# Altium PCB Trigger.PcbDoc (part 3 of 3)
Units mil, origin at the board's own origin, x right, y up, seen from the top; angles counter-clockwise.
Board outline 9937 x 6299 mil, 4 copper layers (TopLayer, MidLayer1, MidLayer2, BottomLayer); 197 components, 279 nets, 1978 pads, 340 vias.
Unrouted connection lines stored in the file: 59.
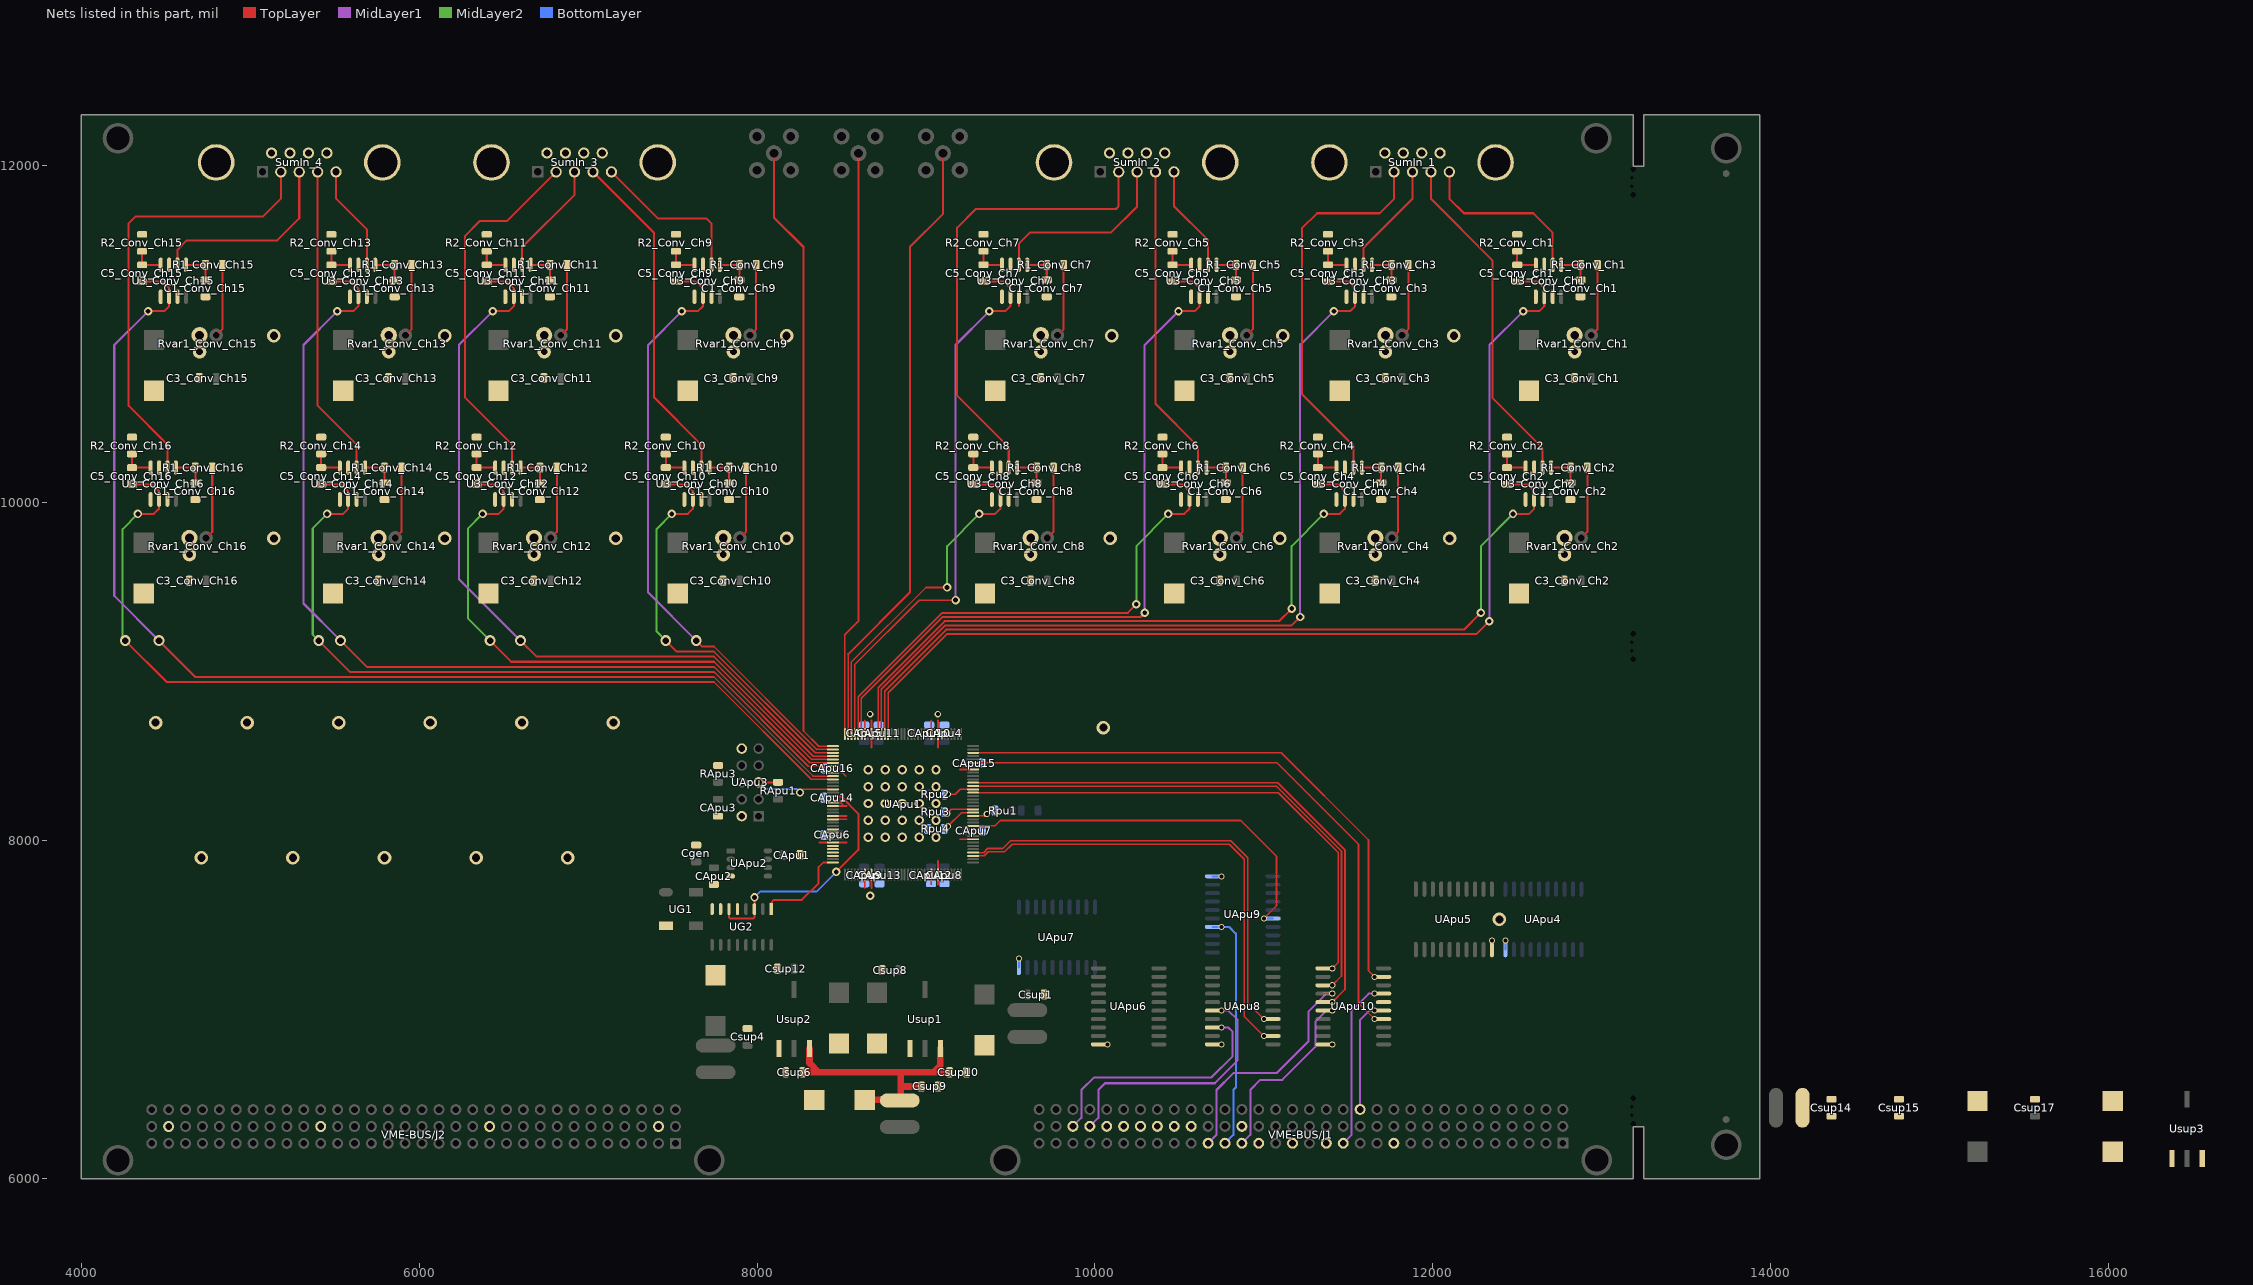
[diagram p5: the nets of this part, all layers, seen from the top]

## Via types
v1: diameter 36, hole 24, TopLayer to BottomLayer, 142 vias
v2: diameter 46, hole 32, TopLayer to BottomLayer, 64 vias
v3: diameter 50, hole 28, TopLayer to BottomLayer, 53 vias
v4: diameter 80, hole 48, TopLayer to BottomLayer, 27 vias
v5: diameter 56, hole 32, TopLayer to BottomLayer, 25 vias
v6: diameter 40, hole 24, TopLayer to BottomLayer, 18 vias
v7: diameter 64, hole 40, TopLayer to BottomLayer, 8 vias
v8: diameter 42, hole 28, TopLayer to BottomLayer, 2 vias
v9: diameter 54, hole 36, TopLayer to BottomLayer, 1 vias

## Nets (pads, with @x,y where several pads share a name; then routed paths per layer and width w, separated by ;. In a path a pad name is that pad's centre, name@x,y a point inside that pad or via, vN(x,y) a via of type N, cw(c..) or ccw(c..) an arc to the next point about the centre after c; other vN are vias at no path point) (continued)
GND: C1_Conv_Ch1.1 C1_Conv_Ch2.1 C1_Conv_Ch3.1 C1_Conv_Ch4.1 C1_Conv_Ch5.1 C1_Conv_Ch6.1 C1_Conv_Ch7.1 C1_Conv_Ch8.1 C1_Conv_Ch9.1 C1_Conv_Ch10.1 C1_Conv_Ch11.1 C1_Conv_Ch12.1 C1_Conv_Ch13.1 C1_Conv_Ch14.1 C1_Conv_Ch15.1 C1_Conv_Ch16.1 C3_Conv_Ch1.1 C3_Conv_Ch2.1 C3_Conv_Ch3.1 C3_Conv_Ch4.1 C3_Conv_Ch5.1 C3_Conv_Ch6.1 C3_Conv_Ch7.1 C3_Conv_Ch8.1 C3_Conv_Ch9.1 C3_Conv_Ch10.1 C3_Conv_Ch11.1 C3_Conv_Ch12.1 C3_Conv_Ch13.1 C3_Conv_Ch14.1 C3_Conv_Ch15.1 C3_Conv_Ch16.1 C4_Conv_Ch1.- C4_Conv_Ch2.- C4_Conv_Ch3.- C4_Conv_Ch4.- C4_Conv_Ch5.- C4_Conv_Ch6.- C4_Conv_Ch7.- C4_Conv_Ch8.- C4_Conv_Ch9.- C4_Conv_Ch10.- C4_Conv_Ch11.- C4_Conv_Ch12.- C4_Conv_Ch13.- C4_Conv_Ch14.- C4_Conv_Ch15.- C4_Conv_Ch16.- CApu1.1 CApu2.1 CApu3.2 CApu4.1 CApu5.1 CApu6.1 CApu7.1 CApu8.1 CApu9.1 CApu10.1 CApu11.1 CApu12.1 CApu13.1 CApu14.1 CApu15.1 CApu16.1 Cgen.1 Csup1.2 Csup2.- Csup3.- Csup4.2 Csup5.- Csup6.2 Csup7.- Csup8.2 Csup9.2 Csup10.2 Csup11.- Csup12.2 Csup13.- Csup14.2 Csup15.2 Csup16.- Csup17.2 R2_Conv_Ch1.2 R2_Conv_Ch2.2 R2_Conv_Ch3.2 R2_Conv_Ch4.2 R2_Conv_Ch5.2 R2_Conv_Ch6.2 R2_Conv_Ch7.2 R2_Conv_Ch8.2 R2_Conv_Ch9.2 R2_Conv_Ch10.2 R2_Conv_Ch11.2 R2_Conv_Ch12.2 R2_Conv_Ch13.2 R2_Conv_Ch14.2 R2_Conv_Ch15.2 R2_Conv_Ch16.2 RApu3.2 Rpu4.1 Rvar1_Conv_Ch1.1 Rvar1_Conv_Ch2.1 Rvar1_Conv_Ch3.1 Rvar1_Conv_Ch4.1 Rvar1_Conv_Ch5.1 Rvar1_Conv_Ch6.1 Rvar1_Conv_Ch7.1 Rvar1_Conv_Ch8.1 Rvar1_Conv_Ch9.1 Rvar1_Conv_Ch10.1 Rvar1_Conv_Ch11.1 Rvar1_Conv_Ch12.1 Rvar1_Conv_Ch13.1 Rvar1_Conv_Ch14.1 Rvar1_Conv_Ch15.1 Rvar1_Conv_Ch16.1 SumIn_1.6 SumIn_1.7 SumIn_1.8 SumIn_1.9 SumIn_1.10 SumIn_1.11 SumIn_2.6 SumIn_2.7 SumIn_2.8 SumIn_2.9 SumIn_2.10 SumIn_2.11 SumIn_3.6 SumIn_3.7 SumIn_3.8 SumIn_3.9 SumIn_3.10 SumIn_3.11 SumIn_4.6 SumIn_4.7 SumIn_4.8 SumIn_4.9 SumIn_4.10 SumIn_4.11 U3_Conv_Ch1.3 U3_Conv_Ch1.5 U3_Conv_Ch2.3 U3_Conv_Ch2.5 U3_Conv_Ch3.3 U3_Conv_Ch3.5 U3_Conv_Ch4.3 U3_Conv_Ch4.5 U3_Conv_Ch5.3 U3_Conv_Ch5.5 U3_Conv_Ch6.3 U3_Conv_Ch6.5 U3_Conv_Ch7.3 U3_Conv_Ch7.5 U3_Conv_Ch8.3 U3_Conv_Ch8.5 U3_Conv_Ch9.3 U3_Conv_Ch9.5 U3_Conv_Ch10.3 U3_Conv_Ch10.5 U3_Conv_Ch11.3 U3_Conv_Ch11.5 U3_Conv_Ch12.3 U3_Conv_Ch12.5 U3_Conv_Ch13.3 U3_Conv_Ch13.5 U3_Conv_Ch14.3 U3_Conv_Ch14.5 U3_Conv_Ch15.3 U3_Conv_Ch15.5 U3_Conv_Ch16.3 U3_Conv_Ch16.5 UApu1.9 UApu1.18 UApu1.19 UApu1.22 UApu1.23 UApu1.30 UApu1.43 UApu1.45 UApu1.63 UApu1.65 UApu1.80 UApu1.101 UApu1.116 UApu1.118 UApu1.136 UApu1.138 UApu2.4 UApu3.2 UApu3.10 UApu4.10 UApu5.10 UApu6.10 UApu7.10 UApu8.10 UApu9.10 UApu10.10 UG1.2 UG2.5 Usup1.1 Usup2.1 Usup3.1 VME-BUS/J1.A11 VME-BUS/J1.A15 VME-BUS/J1.A17 VME-BUS/J1.A19 VME-BUS/J1.B20 VME-BUS/J1.B23 VME-BUS/J2.B2 VME-BUS/J2.B12 VME-BUS/J2.B22 VME-BUS/J2.B31 | length 1955.8
  TopLayer w10: 8368.43,7989.65 UApu1.30@8448.94,7989.65 8529.44,7989.65 ; UApu1.23@8448.94,8127.44 8529.44,8127.44 ; UApu1.22@8448.94,8147.13 8529.44,8147.13 ; UApu1.19@8448.94,8206.18 8529.44,8206.18 ; UApu1.18@8448.94,8225.87 8495.31,8225.87 8515,8206.18 ; UApu1.9@8448.94,8403.03 8505.97,8403.03 8525,8384 ; 8637.91,7720.17 UApu1.43@8637.91,7800.67 ; UApu1.138@8637.91,8631.38 8637.91,8711.88 ; 8677.28,7720.17 UApu1.45@8677.28,7800.67 ; 8677.28,8550.87 UApu1.136@8677.28,8631.38 8677.28,8711.88 ; 9031.61,7740 UApu1.63@9031.61,7800.67 ; UApu1.118@9031.61,8631.38 9031.61,8711.88 ; 9070.98,7740 UApu1.65@9070.98,7810 ; UApu1.65@9070.98,7800.67 9070.98,7881.17 ; 9070.98,8550.87 UApu1.116@9070.98,8631.38 9070.98,8711.88 ; 9199.14,8009.33 UApu1.80@9279.65,8009.33 ; 9199.14,8422.72 UApu1.101@9279.65,8422.72
  TopLayer w12: UApu6.10@10020.87,6795 v1(10075,6795) ; UApu8.10@10695.87,6795 v1(10750,6795) ; UApu10.10@11350.87,6795 v1(11405,6795) ; UApu5.10@12350,7355.87 v1(12350,7410)
  BottomLayer w12: UApu7.10@9550,7250 v1(9550,7304.13) ; UApu9.10@10695.87,7790 v1(10750,7790) ; UApu4.10@12430,7355.87 v1(12430,7410)
  other v3: 8670,7675
  other v4: 12395,7535 4710.95,7900 5252.84,7900 5794.74,7900 6336.63,7900 6878.53,7900 10050,8670 4440,8700 4981.89,8700 5523.79,8700 6065.68,8700 6607.58,8700 7149.47,8700 5140,9790 6151.67,9790 7163.33,9790 8175,9790 10090,9790 11095,9790 12100,9790 5140,10990 6151.67,10990 7163.33,10990 8175,10990 10100,10990 11112.5,10990 12125,10990
  other v5: 8659.29,8021.02 8759.29,8021.02 8859.29,8021.02 8959.29,8021.02 9059.29,8021.02 8659.29,8121.02 8759.29,8121.02 8859.29,8121.02 8959.29,8121.02 9059.29,8121.02 8659.29,8221.02 8759.29,8221.02 8859.29,8221.02 8959.29,8221.02 9059.29,8221.02 8659.29,8321.02 8759.29,8321.02 8859.29,8321.02 8959.29,8321.02 9059.29,8321.02 8659.29,8421.02 8759.29,8421.02 8859.29,8421.02 8959.29,8421.02 9059.29,8421.02
  other v6: 8670,8750 9070,8750
IACK: UApu10.6 VME-BUS/J1.A20 | length 1157.4
  TopLayer w12: UApu10.6@11350.87,6995 v1(11405,6995)
  MidLayer1 w12: VME-BUS/J1.A20@10870,6210 10920,6260 10920,6525 10980,6585 11110,6585 11305,6780 11305,6930 11370,6995 v1(11405,6995)
IACKIN: UApu9.4 VME-BUS/J1.A21 | length 1422.6
  BottomLayer w12: UApu9.4@10695.87,7490 v1(10750,7490) 10795,7490 10835,7450 10835,6540 10820,6525 10820,6260 VME-BUS/J1.A21@10770,6210
IACKINPL: UApu1.84 UApu9.16 | length 2349.8
  TopLayer w8: UApu1.84@9279.65,8088.07 9376.61,8088.07 9408.07,8088.07
  TopLayer w10: 9408.07,8088.07 9440,8120 10863.28,8120 11075,7908.28 11075,7615 v1(11000,7540)
  BottomLayer w12: v1(11000,7540) UApu9.16@11054.13,7540
IACKOUT: UApu10.16 VME-BUS/J1.A22 | length 1413.5
  TopLayer w12: 11350.87,7095 v1(11405,7095)
  MidLayer1 w12: VME-BUS/J1.A22@10670,6210 10720,6260 10720,6525 10820,6625 11075,6625 11265,6815 11265,6990 11370,7095 v1(11405,7095)
IACKPL: UApu1.103 UApu10.14 | length 3608.6
  TopLayer w8: UApu1.103@9279.65,8462.09 11078.06,8462.09
  TopLayer w10: 11078.06,8462.09 11560,7980.15 11560,7040 v1(11655,6945)
  TopLayer w12: v1(11655,6945) UApu10.14@11709.13,6945
IRQ1: UApu8.8 VME-BUS/J1.B30 | length 1488
  TopLayer w12: UApu8.8@10695.87,6895 v1(10750,6895)
  MidLayer1 w12: VME-BUS/J1.B30@9870,6310 9920,6360 9920,6525 9995,6600 10690,6600 10815,6725 10815,6870 10790,6895 v1(10750,6895)
IRQ2: UApu8.6 VME-BUS/J1.B29 | length 1545.1
  TopLayer w12: UApu8.6@10695.87,6995 v1(10750,6995)
  MidLayer1 w12: VME-BUS/J1.B29@9970,6310 10020,6360 10020,6525 10060,6565 10710,6565 10845,6700 10845,6940 10790,6995 v1(10750,6995)
IRQ3: VME-BUS/J1.B28
IRQ4: VME-BUS/J1.B27
IRQ5: VME-BUS/J1.B26
IRQ6: VME-BUS/J1.B25
IRQ7: VME-BUS/J1.B24
IRQPL1: UApu1.75 UApu8.12 | length 2818
  TopLayer w8: UApu1.75@9279.65,7910.91 9345.91,7910.91 9370,7935
  TopLayer w10: 9370,7935 9465,7935 9510,7980 10795,7980 10885,7890 10885,6960 v1(11000,6845)
  TopLayer w12: v1(11000,6845) UApu8.12@11054.13,6845
IRQPL2: UApu1.76 UApu8.14 | length 2744
  TopLayer w8: UApu1.76@9279.65,7930.59 9340.59,7930.59 9365,7955
  TopLayer w10: 9365,7955 9455,7955 9500,8000 10805,8000 10905,7900 10905,7040 v1(11000,6945)
  TopLayer w12: v1(11000,6945) UApu8.14@11054.13,6945
LEDCLK: UApu1.27
LEDERROR: UApu1.31
LEDTRIGGER: UApu1.28
LWORD*: UApu10.15 VME-BUS/J1.C13 | length 691.9
  TopLayer w12: v1(11655,6995) UApu10.15@11709.13,6995
  MidLayer1 w12: VME-BUS/J1.C13@11570,6410 11570,6940 11625,6995 v1(11655,6995)
LWORD*PL: UApu1.97 UApu10.5 | length 3352
  TopLayer w8: UApu1.97@9279.65,8343.98 11083.03,8343.98
  TopLayer w10: 11083.03,8343.98 11480,7947.01 11480,7120 v1(11405,7045)
  TopLayer w12: UApu10.5@11350.87,7045 v1(11405,7045)
NCONFIG: RApu1.2 UApu1.14 UApu3.5 | length 587.2
  TopLayer w8: 8272.87,8304.61 UApu1.14@8448.94,8304.61
  TopLayer w12: UApu3.5@8009.29,8346.02 RApu1.2@8124.29,8346.02 ; v3(8254.29,8286.02) 8272.87,8304.61
  BottomLayer w12: UApu3.5@8009.29,8346.02 8049.29,8306.02 8234.29,8306.02 v3(8254.29,8286.02)
NetC1_Conv_Ch1_2: C1_Conv_Ch1.2 R1_Conv_Ch1.2 U3_Conv_Ch1.1 | length 204.5
  TopLayer w12: U3_Conv_Ch1.1@12760,11409.49 R1_Conv_Ch1.2@12865,11409.49 R1_Conv_Ch1.2@12875,11409.49 R1_Conv_Ch1.2@12875,11389.49 C1_Conv_Ch1.2@12875,11330 C1_Conv_Ch1.2@12875,11320
NetC1_Conv_Ch2_2: C1_Conv_Ch2.2 R1_Conv_Ch2.2 U3_Conv_Ch2.1 | length 204.5
  TopLayer w12: U3_Conv_Ch2.1@12700,10209.49 R1_Conv_Ch2.2@12805,10209.49 R1_Conv_Ch2.2@12815,10209.49 R1_Conv_Ch2.2@12815,10189.49 C1_Conv_Ch2.2@12815,10130 C1_Conv_Ch2.2@12815,10120
NetC1_Conv_Ch3_2: C1_Conv_Ch3.2 R1_Conv_Ch3.2 U3_Conv_Ch3.1 | length 204.5
  TopLayer w12: U3_Conv_Ch3.1@11640,11409.49 R1_Conv_Ch3.2@11745,11409.49 R1_Conv_Ch3.2@11755,11409.49 R1_Conv_Ch3.2@11755,11389.49 C1_Conv_Ch3.2@11755,11330 C1_Conv_Ch3.2@11755,11320
NetC1_Conv_Ch4_2: C1_Conv_Ch4.2 R1_Conv_Ch4.2 U3_Conv_Ch4.1 | length 204.5
  TopLayer w12: U3_Conv_Ch4.1@11580,10209.49 R1_Conv_Ch4.2@11685,10209.49 R1_Conv_Ch4.2@11695,10209.49 R1_Conv_Ch4.2@11695,10189.49 C1_Conv_Ch4.2@11695,10130 C1_Conv_Ch4.2@11695,10120
NetC1_Conv_Ch5_2: C1_Conv_Ch5.2 R1_Conv_Ch5.2 U3_Conv_Ch5.1 | length 204.5
  TopLayer w12: U3_Conv_Ch5.1@10720,11409.49 R1_Conv_Ch5.2@10825,11409.49 R1_Conv_Ch5.2@10835,11409.49 R1_Conv_Ch5.2@10835,11389.49 C1_Conv_Ch5.2@10835,11330 C1_Conv_Ch5.2@10835,11320
NetC1_Conv_Ch6_2: C1_Conv_Ch6.2 R1_Conv_Ch6.2 U3_Conv_Ch6.1 | length 204.5
  TopLayer w12: U3_Conv_Ch6.1@10660,10209.49 R1_Conv_Ch6.2@10765,10209.49 R1_Conv_Ch6.2@10775,10209.49 R1_Conv_Ch6.2@10775,10189.49 C1_Conv_Ch6.2@10775,10130 C1_Conv_Ch6.2@10775,10120
NetC1_Conv_Ch7_2: C1_Conv_Ch7.2 R1_Conv_Ch7.2 U3_Conv_Ch7.1 | length 204.5
  TopLayer w12: U3_Conv_Ch7.1@9600,11409.49 R1_Conv_Ch7.2@9705,11409.49 R1_Conv_Ch7.2@9715,11409.49 R1_Conv_Ch7.2@9715,11389.49 C1_Conv_Ch7.2@9715,11330 C1_Conv_Ch7.2@9715,11320
NetC1_Conv_Ch8_2: C1_Conv_Ch8.2 R1_Conv_Ch8.2 U3_Conv_Ch8.1 | length 204.5
  TopLayer w12: U3_Conv_Ch8.1@9540,10209.49 R1_Conv_Ch8.2@9645,10209.49 R1_Conv_Ch8.2@9655,10209.49 R1_Conv_Ch8.2@9655,10189.49 C1_Conv_Ch8.2@9655,10130 C1_Conv_Ch8.2@9655,10120
NetC1_Conv_Ch9_2: C1_Conv_Ch9.2 R1_Conv_Ch9.2 U3_Conv_Ch9.1 | length 204.5
  TopLayer w12: U3_Conv_Ch9.1@7780,11409.49 R1_Conv_Ch9.2@7885,11409.49 R1_Conv_Ch9.2@7895,11409.49 R1_Conv_Ch9.2@7895,11389.49 C1_Conv_Ch9.2@7895,11330 C1_Conv_Ch9.2@7895,11320
NetC1_Conv_Ch10_2: C1_Conv_Ch10.2 R1_Conv_Ch10.2 U3_Conv_Ch10.1 | length 204.5
  TopLayer w12: U3_Conv_Ch10.1@7720,10209.49 R1_Conv_Ch10.2@7825,10209.49 R1_Conv_Ch10.2@7835,10209.49 R1_Conv_Ch10.2@7835,10189.49 C1_Conv_Ch10.2@7835,10130 C1_Conv_Ch10.2@7835,10120
NetC1_Conv_Ch11_2: C1_Conv_Ch11.2 R1_Conv_Ch11.2 U3_Conv_Ch11.1 | length 204.5
  TopLayer w12: U3_Conv_Ch11.1@6660,11409.49 R1_Conv_Ch11.2@6765,11409.49 R1_Conv_Ch11.2@6775,11409.49 R1_Conv_Ch11.2@6775,11389.49 C1_Conv_Ch11.2@6775,11330 C1_Conv_Ch11.2@6775,11320
NetC1_Conv_Ch12_2: C1_Conv_Ch12.2 R1_Conv_Ch12.2 U3_Conv_Ch12.1 | length 204.5
  TopLayer w12: U3_Conv_Ch12.1@6600,10209.49 R1_Conv_Ch12.2@6705,10209.49 R1_Conv_Ch12.2@6715,10209.49 R1_Conv_Ch12.2@6715,10189.49 C1_Conv_Ch12.2@6715,10130 C1_Conv_Ch12.2@6715,10120
NetC1_Conv_Ch13_2: C1_Conv_Ch13.2 R1_Conv_Ch13.2 U3_Conv_Ch13.1 | length 204.5
  TopLayer w12: U3_Conv_Ch13.1@5740,11409.49 R1_Conv_Ch13.2@5845,11409.49 R1_Conv_Ch13.2@5855,11409.49 R1_Conv_Ch13.2@5855,11389.49 C1_Conv_Ch13.2@5855,11330 C1_Conv_Ch13.2@5855,11320
NetC1_Conv_Ch14_2: C1_Conv_Ch14.2 R1_Conv_Ch14.2 U3_Conv_Ch14.1 | length 204.5
  TopLayer w12: U3_Conv_Ch14.1@5680,10209.49 R1_Conv_Ch14.2@5785,10209.49 R1_Conv_Ch14.2@5795,10209.49 R1_Conv_Ch14.2@5795,10189.49 C1_Conv_Ch14.2@5795,10130 C1_Conv_Ch14.2@5795,10120
NetC1_Conv_Ch15_2: C1_Conv_Ch15.2 R1_Conv_Ch15.2 U3_Conv_Ch15.1 | length 204.5
  TopLayer w12: U3_Conv_Ch15.1@4620,11409.49 R1_Conv_Ch15.2@4725,11409.49 R1_Conv_Ch15.2@4735,11409.49 R1_Conv_Ch15.2@4735,11389.49 C1_Conv_Ch15.2@4735,11330 C1_Conv_Ch15.2@4735,11320
NetC1_Conv_Ch16_2: C1_Conv_Ch16.2 R1_Conv_Ch16.2 U3_Conv_Ch16.1 | length 204.5
  TopLayer w12: U3_Conv_Ch16.1@4560,10209.49 R1_Conv_Ch16.2@4665,10209.49 R1_Conv_Ch16.2@4675,10209.49 R1_Conv_Ch16.2@4675,10189.49 C1_Conv_Ch16.2@4675,10130 C1_Conv_Ch16.2@4675,10120
NetC5_Conv_Ch1_1: C5_Conv_Ch1.1 R2_Conv_Ch1.1 U3_Conv_Ch1.4 | length 194.7
  TopLayer w12: R2_Conv_Ch1.1@12500,11500 R2_Conv_Ch1.1@12500,11490 R2_Conv_Ch1.1@12500,11480 C5_Conv_Ch1.1@12500,11419.49 12510,11409.49 C5_Conv_Ch1.1@12520,11409.49 U3_Conv_Ch1.4@12610,11409.49
NetC5_Conv_Ch1_2: C5_Conv_Ch1.2 U3_Conv_Ch1.6
NetC5_Conv_Ch2_1: C5_Conv_Ch2.1 R2_Conv_Ch2.1 U3_Conv_Ch2.4 | length 194.7
  TopLayer w12: R2_Conv_Ch2.1@12440,10300 R2_Conv_Ch2.1@12440,10290 R2_Conv_Ch2.1@12440,10280 C5_Conv_Ch2.1@12440,10219.49 12450,10209.49 C5_Conv_Ch2.1@12460,10209.49 U3_Conv_Ch2.4@12550,10209.49
NetC5_Conv_Ch2_2: C5_Conv_Ch2.2 U3_Conv_Ch2.6
NetC5_Conv_Ch3_1: C5_Conv_Ch3.1 R2_Conv_Ch3.1 U3_Conv_Ch3.4 | length 194.7
  TopLayer w12: R2_Conv_Ch3.1@11380,11500 R2_Conv_Ch3.1@11380,11490 R2_Conv_Ch3.1@11380,11480 C5_Conv_Ch3.1@11380,11419.49 11390,11409.49 C5_Conv_Ch3.1@11400,11409.49 U3_Conv_Ch3.4@11490,11409.49
NetC5_Conv_Ch3_2: C5_Conv_Ch3.2 U3_Conv_Ch3.6
NetC5_Conv_Ch4_1: C5_Conv_Ch4.1 R2_Conv_Ch4.1 U3_Conv_Ch4.4 | length 194.7
  TopLayer w12: R2_Conv_Ch4.1@11320,10300 R2_Conv_Ch4.1@11320,10290 R2_Conv_Ch4.1@11320,10280 C5_Conv_Ch4.1@11320,10219.49 11330,10209.49 C5_Conv_Ch4.1@11340,10209.49 U3_Conv_Ch4.4@11430,10209.49
NetC5_Conv_Ch4_2: C5_Conv_Ch4.2 U3_Conv_Ch4.6
NetC5_Conv_Ch5_1: C5_Conv_Ch5.1 R2_Conv_Ch5.1 U3_Conv_Ch5.4 | length 194.7
  TopLayer w12: R2_Conv_Ch5.1@10460,11500 R2_Conv_Ch5.1@10460,11490 R2_Conv_Ch5.1@10460,11480 C5_Conv_Ch5.1@10460,11419.49 10470,11409.49 C5_Conv_Ch5.1@10480,11409.49 U3_Conv_Ch5.4@10570,11409.49
NetC5_Conv_Ch5_2: C5_Conv_Ch5.2 U3_Conv_Ch5.6
NetC5_Conv_Ch6_1: C5_Conv_Ch6.1 R2_Conv_Ch6.1 U3_Conv_Ch6.4 | length 194.7
  TopLayer w12: R2_Conv_Ch6.1@10400,10300 R2_Conv_Ch6.1@10400,10290 R2_Conv_Ch6.1@10400,10280 C5_Conv_Ch6.1@10400,10219.49 10410,10209.49 C5_Conv_Ch6.1@10420,10209.49 U3_Conv_Ch6.4@10510,10209.49
NetC5_Conv_Ch6_2: C5_Conv_Ch6.2 U3_Conv_Ch6.6
NetC5_Conv_Ch7_1: C5_Conv_Ch7.1 R2_Conv_Ch7.1 U3_Conv_Ch7.4 | length 194.7
  TopLayer w12: R2_Conv_Ch7.1@9340,11500 R2_Conv_Ch7.1@9340,11490 R2_Conv_Ch7.1@9340,11480 C5_Conv_Ch7.1@9340,11419.49 9350,11409.49 C5_Conv_Ch7.1@9360,11409.49 U3_Conv_Ch7.4@9450,11409.49
NetC5_Conv_Ch7_2: C5_Conv_Ch7.2 U3_Conv_Ch7.6
NetC5_Conv_Ch8_1: C5_Conv_Ch8.1 R2_Conv_Ch8.1 U3_Conv_Ch8.4 | length 194.7
  TopLayer w12: R2_Conv_Ch8.1@9280,10300 R2_Conv_Ch8.1@9280,10290 R2_Conv_Ch8.1@9280,10280 C5_Conv_Ch8.1@9280,10219.49 9290,10209.49 C5_Conv_Ch8.1@9300,10209.49 U3_Conv_Ch8.4@9390,10209.49
NetC5_Conv_Ch8_2: C5_Conv_Ch8.2 U3_Conv_Ch8.6
NetC5_Conv_Ch9_1: C5_Conv_Ch9.1 R2_Conv_Ch9.1 U3_Conv_Ch9.4 | length 194.7
  TopLayer w12: R2_Conv_Ch9.1@7520,11500 R2_Conv_Ch9.1@7520,11490 R2_Conv_Ch9.1@7520,11480 C5_Conv_Ch9.1@7520,11419.49 7530,11409.49 C5_Conv_Ch9.1@7540,11409.49 U3_Conv_Ch9.4@7630,11409.49
NetC5_Conv_Ch9_2: C5_Conv_Ch9.2 U3_Conv_Ch9.6
NetC5_Conv_Ch10_1: C5_Conv_Ch10.1 R2_Conv_Ch10.1 U3_Conv_Ch10.4 | length 194.7
  TopLayer w12: R2_Conv_Ch10.1@7460,10300 R2_Conv_Ch10.1@7460,10290 R2_Conv_Ch10.1@7460,10280 C5_Conv_Ch10.1@7460,10219.49 7470,10209.49 C5_Conv_Ch10.1@7480,10209.49 U3_Conv_Ch10.4@7570,10209.49
NetC5_Conv_Ch10_2: C5_Conv_Ch10.2 U3_Conv_Ch10.6
NetC5_Conv_Ch11_1: C5_Conv_Ch11.1 R2_Conv_Ch11.1 U3_Conv_Ch11.4 | length 194.7
  TopLayer w12: R2_Conv_Ch11.1@6400,11500 R2_Conv_Ch11.1@6400,11490 R2_Conv_Ch11.1@6400,11480 C5_Conv_Ch11.1@6400,11419.49 6410,11409.49 C5_Conv_Ch11.1@6420,11409.49 U3_Conv_Ch11.4@6510,11409.49
NetC5_Conv_Ch11_2: C5_Conv_Ch11.2 U3_Conv_Ch11.6
NetC5_Conv_Ch12_1: C5_Conv_Ch12.1 R2_Conv_Ch12.1 U3_Conv_Ch12.4 | length 194.7
  TopLayer w12: R2_Conv_Ch12.1@6340,10300 R2_Conv_Ch12.1@6340,10290 R2_Conv_Ch12.1@6340,10280 C5_Conv_Ch12.1@6340,10219.49 6350,10209.49 C5_Conv_Ch12.1@6360,10209.49 U3_Conv_Ch12.4@6450,10209.49
NetC5_Conv_Ch12_2: C5_Conv_Ch12.2 U3_Conv_Ch12.6
NetC5_Conv_Ch13_1: C5_Conv_Ch13.1 R2_Conv_Ch13.1 U3_Conv_Ch13.4 | length 194.7
  TopLayer w12: R2_Conv_Ch13.1@5480,11500 R2_Conv_Ch13.1@5480,11490 R2_Conv_Ch13.1@5480,11480 C5_Conv_Ch13.1@5480,11419.49 5490,11409.49 C5_Conv_Ch13.1@5500,11409.49 U3_Conv_Ch13.4@5590,11409.49
NetC5_Conv_Ch13_2: C5_Conv_Ch13.2 U3_Conv_Ch13.6
NetC5_Conv_Ch14_1: C5_Conv_Ch14.1 R2_Conv_Ch14.1 U3_Conv_Ch14.4 | length 194.7
  TopLayer w12: R2_Conv_Ch14.1@5420,10300 R2_Conv_Ch14.1@5420,10290 R2_Conv_Ch14.1@5420,10280 C5_Conv_Ch14.1@5420,10219.49 5430,10209.49 C5_Conv_Ch14.1@5440,10209.49 U3_Conv_Ch14.4@5530,10209.49
NetC5_Conv_Ch14_2: C5_Conv_Ch14.2 U3_Conv_Ch14.6
NetC5_Conv_Ch15_1: C5_Conv_Ch15.1 R2_Conv_Ch15.1 U3_Conv_Ch15.4 | length 194.7
  TopLayer w12: R2_Conv_Ch15.1@4360,11500 R2_Conv_Ch15.1@4360,11490 R2_Conv_Ch15.1@4360,11480 C5_Conv_Ch15.1@4360,11419.49 4370,11409.49 C5_Conv_Ch15.1@4380,11409.49 U3_Conv_Ch15.4@4470,11409.49
NetC5_Conv_Ch15_2: C5_Conv_Ch15.2 U3_Conv_Ch15.6
NetC5_Conv_Ch16_1: C5_Conv_Ch16.1 R2_Conv_Ch16.1 U3_Conv_Ch16.4 | length 194.7
  TopLayer w12: R2_Conv_Ch16.1@4300,10300 R2_Conv_Ch16.1@4300,10290 R2_Conv_Ch16.1@4300,10280 C5_Conv_Ch16.1@4300,10219.49 4310,10209.49 C5_Conv_Ch16.1@4320,10209.49 U3_Conv_Ch16.4@4410,10209.49
NetC5_Conv_Ch16_2: C5_Conv_Ch16.2 U3_Conv_Ch16.6
NetCsup5_+: Csup5.+ Csup6.1 Csup9.1 Csup10.1 Lref4.2 Usup1.3 Usup2.3 | length 1676.5
  TopLayer w40: Csup6.1@8270,6630 Csup6.1@8280,6630 8365,6630 ; Usup2.3@8310,6770 8310,6685 8365,6630 ; Csup5.+@8638,6466.07 8639.41,6467.48 8850,6467.48 8850,6544.93 8850,6630 ; 8851,6545.93 Csup9.1@8963,6545.93 ; Usup1.3@9085,6770 9085,6670 9045,6630 ; Csup10.1@9140,6630 9045,6630 ; 8365,6630 8850,6630 ; 8850,6630 9045,6630
NetCsup13_+: Csup13.+ Csup14.1 Csup15.1 Lref3.2 Usup3.3
NetR1_Conv_Ch1_1: R1_Conv_Ch1.1 Rvar1_Conv_Ch1.3 | length 431.7
  TopLayer w12: 12938.43,10992.91 12975,11029.49 R1_Conv_Ch1.1@12975,11389.49 R1_Conv_Ch1.1@12975,11409.49
NetR1_Conv_Ch2_1: R1_Conv_Ch2.1 Rvar1_Conv_Ch2.3 | length 431.7
  TopLayer w12: 12878.43,9792.91 12915,9829.49 R1_Conv_Ch2.1@12915,10189.49 R1_Conv_Ch2.1@12915,10209.49
NetR1_Conv_Ch3_1: R1_Conv_Ch3.1 Rvar1_Conv_Ch3.3 | length 431.7
  TopLayer w12: 11818.43,10992.91 11855,11029.49 R1_Conv_Ch3.1@11855,11389.49 R1_Conv_Ch3.1@11855,11409.49
NetR1_Conv_Ch4_1: R1_Conv_Ch4.1 Rvar1_Conv_Ch4.3 | length 431.7
  TopLayer w12: 11758.43,9792.91 11795,9829.49 R1_Conv_Ch4.1@11795,10189.49 R1_Conv_Ch4.1@11795,10209.49
NetR1_Conv_Ch5_1: R1_Conv_Ch5.1 Rvar1_Conv_Ch5.3 | length 431.7
  TopLayer w12: 10898.43,10992.91 10935,11029.49 R1_Conv_Ch5.1@10935,11389.49 R1_Conv_Ch5.1@10935,11409.49
NetR1_Conv_Ch6_1: R1_Conv_Ch6.1 Rvar1_Conv_Ch6.3 | length 431.7
  TopLayer w12: 10838.43,9792.91 10875,9829.49 R1_Conv_Ch6.1@10875,10189.49 R1_Conv_Ch6.1@10875,10209.49
NetR1_Conv_Ch7_1: R1_Conv_Ch7.1 Rvar1_Conv_Ch7.3 | length 431.7
  TopLayer w12: 9778.43,10992.91 9815,11029.49 R1_Conv_Ch7.1@9815,11389.49 R1_Conv_Ch7.1@9815,11409.49
NetR1_Conv_Ch8_1: R1_Conv_Ch8.1 Rvar1_Conv_Ch8.3 | length 431.7
  TopLayer w12: 9718.43,9792.91 9755,9829.49 R1_Conv_Ch8.1@9755,10189.49 R1_Conv_Ch8.1@9755,10209.49
NetR1_Conv_Ch9_1: R1_Conv_Ch9.1 Rvar1_Conv_Ch9.3 | length 431.7
  TopLayer w12: 7958.43,10992.91 7995,11029.49 R1_Conv_Ch9.1@7995,11389.49 R1_Conv_Ch9.1@7995,11409.49
NetR1_Conv_Ch10_1: R1_Conv_Ch10.1 Rvar1_Conv_Ch10.3 | length 431.7
  TopLayer w12: 7898.43,9792.91 7935,9829.49 R1_Conv_Ch10.1@7935,10189.49 R1_Conv_Ch10.1@7935,10209.49
NetR1_Conv_Ch11_1: R1_Conv_Ch11.1 Rvar1_Conv_Ch11.3 | length 431.7
  TopLayer w12: 6838.43,10992.91 6875,11029.49 R1_Conv_Ch11.1@6875,11389.49 R1_Conv_Ch11.1@6875,11409.49
NetR1_Conv_Ch12_1: R1_Conv_Ch12.1 Rvar1_Conv_Ch12.3 | length 431.7
  TopLayer w12: 6778.43,9792.91 6815,9829.49 R1_Conv_Ch12.1@6815,10189.49 R1_Conv_Ch12.1@6815,10209.49
NetR1_Conv_Ch13_1: R1_Conv_Ch13.1 Rvar1_Conv_Ch13.3 | length 431.7
  TopLayer w12: 5918.43,10992.91 5955,11029.49 R1_Conv_Ch13.1@5955,11389.49 R1_Conv_Ch13.1@5955,11409.49
NetR1_Conv_Ch14_1: R1_Conv_Ch14.1 Rvar1_Conv_Ch14.3 | length 431.7
  TopLayer w12: 5858.43,9792.91 5895,9829.49 R1_Conv_Ch14.1@5895,10189.49 R1_Conv_Ch14.1@5895,10209.49
NetR1_Conv_Ch15_1: R1_Conv_Ch15.1 Rvar1_Conv_Ch15.3 | length 431.7
  TopLayer w12: 4798.43,10992.91 4835,11029.49 R1_Conv_Ch15.1@4835,11389.49 R1_Conv_Ch15.1@4835,11409.49
NetR1_Conv_Ch16_1: R1_Conv_Ch16.1 Rvar1_Conv_Ch16.3 | length 431.7
  TopLayer w12: 4738.43,9792.91 4775,9829.49 R1_Conv_Ch16.1@4775,10189.49 R1_Conv_Ch16.1@4775,10209.49
NetU3_Conv_Ch1_7: U3_Conv_Ch1.7
NetU3_Conv_Ch2_7: U3_Conv_Ch2.7
NetU3_Conv_Ch3_7: U3_Conv_Ch3.7
NetU3_Conv_Ch4_7: U3_Conv_Ch4.7
NetU3_Conv_Ch5_7: U3_Conv_Ch5.7
NetU3_Conv_Ch6_7: U3_Conv_Ch6.7
NetU3_Conv_Ch7_7: U3_Conv_Ch7.7 | length 55.5
  TopLayer w12: 9550,11165 U3_Conv_Ch7.7@9550,11220.51
NetU3_Conv_Ch8_7: U3_Conv_Ch8.7
NetU3_Conv_Ch9_7: U3_Conv_Ch9.7
NetU3_Conv_Ch10_7: U3_Conv_Ch10.7
NetU3_Conv_Ch11_7: U3_Conv_Ch11.7
NetU3_Conv_Ch12_7: U3_Conv_Ch12.7
NetU3_Conv_Ch13_7: U3_Conv_Ch13.7
NetU3_Conv_Ch14_7: U3_Conv_Ch14.7
NetU3_Conv_Ch15_7: U3_Conv_Ch15.7
NetU3_Conv_Ch16_7: U3_Conv_Ch16.7
NSTATUS: Rpu1.2 UApu1.87 | length 142.4
  TopLayer w8: UApu1.87@9279.65,8147.13 9347.13,8147.13
  TopLayer w12: 9347.13,8147.13 v1(9360,8160)
  BottomLayer w12: v1(9360,8160) 9378.9,8178.9 Rpu1.2@9408.9,8178.9
PLL_CLOCK: UApu1.16 UG2.3 UG2.6 | length 1448.8
  TopLayer w12: UG2.6@7834.29,7596.02 7834.29,7546.02 7839.29,7541.02 7979.29,7541.02 7984.29,7546.02 UG2.3@7984.29,7596.02 v3@7984.29,7651.02 ; UApu1.16@8448.94,8265.24 8494.76,8265.24 8600,8160 8600,7946.73 v3(8469.13,7815.87)
  BottomLayer w10: v3(7985,7665) 8020,7700 8353.27,7700 v3(8469.13,7815.87)
PLLEXTOUT: UApu1.26
PLLLOCTED: UApu1.33
SUM_CH1: SumIn_1.5 U3_Conv_Ch1.2 | length 1044.2
  TopLayer w12: SumIn_1.5@12098.11,11960.08 12098.11,11801.89 12185,11715 12595,11715 12710,11600 U3_Conv_Ch1.2@12710,11409.49
SUM_CH2: SumIn_1.4 U3_Conv_Ch2.2 | length 2024.6
  TopLayer w12: SumIn_1.4@11989.49,11960.51 11989.49,11800.51 12355,11435 12355,10620 12650,10325 U3_Conv_Ch2.2@12650,10209.49
SUM_CH3: SumIn_1.3 U3_Conv_Ch3.2 | length 670.7
  TopLayer w12: U3_Conv_Ch3.2@11590,11409.49 11590,11510 11880,11800 SumIn_1.3@11880,11960.08
SUM_CH4: SumIn_1.2 U3_Conv_Ch4.2 | length 2319.8
  TopLayer w12: U3_Conv_Ch4.2@11530,10209.49 11530,10340 11225,10645 11225,11625 11315,11715 11685,11715 11770.94,11800.94 SumIn_1.2@11770.94,11960.08
SUM_CH5: SumIn_2.5 U3_Conv_Ch5.2 | length 634.2
  TopLayer w12: SumIn_2.5@10468.11,11960.08 10468.11,11756.89 10670,11555 U3_Conv_Ch5.2@10670,11409.49
SUM_CH6: SumIn_2.4 U3_Conv_Ch6.2 | length 1854.5
  TopLayer w12: SumIn_2.4@10359.06,11960.08 10359.06,10585.94 10610,10335 U3_Conv_Ch6.2@10610,10209.49
SUM_CH7: SumIn_2.3 U3_Conv_Ch7.2 | length 1121.7
  TopLayer w12: U3_Conv_Ch7.2@9550,11409.49 9550,11535 9615,11600 10095,11600 10250,11755 SumIn_2.3@10250,11960.08
SUM_CH8: SumIn_2.2 U3_Conv_Ch8.2 | length 2759.1
  TopLayer w12: U3_Conv_Ch8.2@9490,10209.49 9490,10330 9185,10635 9185,11630 9295,11740 10125,11740 10140.94,11755.94 SumIn_2.2@10140.94,11960.08
SUM_CH9: SumIn_3.5 U3_Conv_Ch9.2 | length 963.8
  TopLayer w12: SumIn_3.5@7138.11,11960.08 7413.19,11685 7700,11685 7730,11655 U3_Conv_Ch9.2@7730,11409.49
SUM_CH10: SumIn_3.4 U3_Conv_Ch10.2 | length 2016.1
  TopLayer w12: SumIn_3.4@7029.06,11960.08 7390,11599.13 7390,10625 7670,10345 U3_Conv_Ch10.2@7670,10209.49
SUM_CH11: SumIn_3.3 U3_Conv_Ch11.2 | length 679
  TopLayer w12: U3_Conv_Ch11.2@6610,11409.49 6610,11515 6920,11825 SumIn_3.3@6920,11960.08
SUM_CH12: SumIn_3.2 U3_Conv_Ch12.2 | length 2184.9
  TopLayer w12: U3_Conv_Ch12.2@6550,10209.49 6550,10345 6270,10625 6270,11580 6360,11670 6520.87,11670 SumIn_3.2@6810.94,11960.08
SUM_CH13: SumIn_4.5 U3_Conv_Ch13.2 | length 625.9
  TopLayer w12: SumIn_4.5@5508.11,11960.08 5508.11,11801.89 5690,11620 U3_Conv_Ch13.2@5690,11409.49
SUM_CH14: SumIn_4.4 U3_Conv_Ch14.2 | length 1846.3
  TopLayer w12: SumIn_4.4@5399.06,11960.08 5399.06,10575.94 5630,10345 U3_Conv_Ch14.2@5630,10209.49
SUM_CH15: SumIn_4.3 U3_Conv_Ch15.2 | length 1162.2
  TopLayer w12: U3_Conv_Ch15.2@4570,11409.49 4570,11500 4625,11555 5160,11555 5290,11685 SumIn_4.3@5290,11960.08
SUM_CH16: SumIn_4.2 U3_Conv_Ch16.2 | length 2661.3
  TopLayer w12: U3_Conv_Ch16.2@4510,10209.49 4510,10345 4280,10575 4280,11655 4320,11695 5075,11695 5180.94,11800.94 SumIn_4.2@5180.94,11960.08
SW_CL: UApu1.34 UG2.8
SW_FL: UApu1.36 UG2.1 | length 556.8
  TopLayer w10: 8365,7845 8391.54,7871.54 UApu1.36@8448.94,7871.54
  TopLayer w12: UG2.1@8084.29,7596.02 8084.29,7634.29 8100,7650 8265,7650 8365,7750 8365,7845
SYNCROCLK: UApu1.144 UG2.7 | length 3471.6
  TopLayer w8: UApu1.144@8520.31,8631.38 8520.31,9220.31
  TopLayer w12: 8520.31,9220.31 8600,9300 8600,12070
SYS_OE1: UApu1.94 UApu10.1 | length 3061.3
  TopLayer w8: UApu1.94@9279.65,8285 11085.44,8285
  TopLayer w10: 11085.44,8285 11440,7930.44 11440,7280 v1(11405,7245)
  TopLayer w12: UApu10.1@11350.87,7245 v1(11405,7245)
SYS_OE2: UApu1.106 UApu10.19 | length 3432.8
  TopLayer w10: UApu1.106@9279.65,8521.14 11103.86,8521.14 11620,8005 11620,7230 v1(11655,7195)
  TopLayer w12: v1(11655,7195) UApu10.19@11709.13,7195
TCK: Rpu4.2 UApu1.88 | length 183.8
  TopLayer w8: 9210.08,8166.81 UApu1.88@9279.65,8166.81
  TopLayer w10: v6(9129.29,8086.02) 9210.08,8166.81
TDI: Rpu2.2 UApu1.95 | length 162.2
  TopLayer w8: 9202.87,8304.61 UApu1.95@9279.65,8304.61
  TopLayer w10: v6(9129.29,8276.02) 9174.29,8276.02 9202.87,8304.61
TEST: UApu1.32
TMS: Rpu3.2 UApu1.89 | length 165.9
  TopLayer w8: 9169.29,8186.5 UApu1.89@9279.65,8186.5
  TopLayer w10: v6(9124.29,8161.02) 9149.76,8186.5 9169.29,8186.5
TRIG_CH1: UApu1.131 | length 6316.3
  TopLayer w8: 8775.39,8875.39 9125,9225 ; UApu1.131@8775.71,8631.38 8775.71,8875.39
  TopLayer w12: 9125,9225 12260,9225 v3(12335,9300) ; 12500,11310 12620,11310 12660,11270 12660,11220.51 12660,11165 12630,11135 v3(12535,11135)
  MidLayer1 w12: v3(12335,9300) 12335,10935 v3(12535,11135)
TRIG_CH2: UApu1.132 | length 5058.6
  TopLayer w8: 8755.71,8885.71 9120,9250 ; UApu1.132@8756.02,8631.38 8756.02,8885.71
  TopLayer w12: 9120,9250 12185,9250 v3(12285,9350) ; 12440,10110 12560,10110 12600,10070 12600,10020.51 12600,9965 12570,9935 v3(12475,9935)
  MidLayer2 w12: v3(12285,9350) 12285,9745 v3(12475,9935)
TRIG_CH3: UApu1.133 | length 5230.9
  TopLayer w8: UApu1.133@8736.34,8631.38 8736.34,8896.34 9115,9275
  TopLayer w12: 9115,9275 11165,9275 v3(11215,9325) ; 11380,11310 11500,11310 11540,11270 11540,11220.51 11540,11165 11510,11135 v3(11415,11135)
  MidLayer1 w12: v3(11215,9325) 11215,10940 ; 11220,10940 v3(11415,11135)
TRIG_CH4: UApu1.134 | length 3975.3
  TopLayer w8: UApu1.134@8716.65,8631.38 8716.65,8906.65 9110,9300
  TopLayer w12: 9110,9300 11090,9300 v3(11165,9375) ; 11320,10110 11440,10110 11480,10070 11480,10020.51 11480,9965 11450,9935 v3(11355,9935)
  MidLayer2 w12: v3(11165,9375) 11165,9745 v3(11355,9935)
TRIG_CH5: UApu1.139 | length 4385.4
  TopLayer w8: UApu1.139@8618.23,8631.38 8618.23,8843.23 9100,9325
  TopLayer w12: 9100,9325 10270,9325 v3(10295,9350) ; 10460,11310 10580,11310 10620,11270 10620,11220.51 10620,11165 10590,11135 v3(10495,11135)
  MidLayer1 w12: v3(10295,9350) 10295,10935 v3(10495,11135)
TRIG_CH6: UApu1.140 | length 3127.7
  TopLayer w8: UApu1.140@8598.54,8631.38 8598.54,8755 8598.54,8853.54 9095,9350
  TopLayer w12: 9095,9350 10195,9350 v3(10245,9400) ; 10400,10110 10520,10110 10560,10070 10560,10020.51 10560,9965 10530,9935 v3(10435,9935)
  MidLayer2 w12: v3(10245,9400) 10245,9745 v3(10435,9935)
TRIG_CH7: UApu1.141 | length 3378.2
  TopLayer w8: UApu1.141@8579.17,8631.38 8579.17,9044.17
  TopLayer w10: 8579.17,9044.17 8960,9425 v3(9175,9425)
  TopLayer w12: 9340,11310 9460,11310 9500,11270 9500,11220.51 9500,11165 9470,11135 v3(9375,11135)
  MidLayer1 w12: v3(9175,9425) 9175,10935 v3(9375,11135)
TRIG_CH8: UApu1.142 | length 2108.9
  TopLayer w8: UApu1.142@8559.17,8631.38 8559.17,9059.17
  TopLayer w10: 8559.17,9059.17 9000,9500
  TopLayer w12: 9000,9500 v3(9125,9500) ; 9280,10110 9400,10110 9440,10070 9440,10020.51 9440,9965 9410,9935 v3(9315,9935)
  MidLayer2 w12: v3(9125,9500) 9125,9745 v3(9315,9935)
TRIG_CH9: UApu1.2 | length 3645.7
  TopLayer w8: 8354.17,8540.83 UApu1.2@8448.94,8540.83
  TopLayer w10: 7745,9150 8354.17,8540.83
  TopLayer w12: 7520,11310 7640,11310 7680,11270 7680,11220.51 7680,11165 7650,11135 v3(7555,11135) ; v7(7640,9185) 7675,9150 7745,9150
  MidLayer1 w12: v3(7555,11135) 7355,10935 7355,9470 v7(7640,9185)
TRIG_CH10: UApu1.3 | length 2493
  TopLayer w8: 8343.86,8521.14 UApu1.3@8448.94,8521.14
  TopLayer w10: 7745,9120 8343.86,8521.14
  TopLayer w12: v7(7460,9185) 7525,9120 7745,9120 ; 7460,10110 7580,10110 7620,10070 7620,10020.51 7620,9965 7590,9935 v3(7495,9935)
  MidLayer2 w12: v7(7460,9185) 7405,9240 7405,9845 v3(7495,9935)
TRIG_CH11: UApu1.4 | length 4735.1
  TopLayer w8: 8333.54,8501.46 UApu1.4@8448.94,8501.46
  TopLayer w10: 7745,9090 8333.54,8501.46
  TopLayer w12: 6400,11310 6520,11310 6560,11270 6560,11220.51 6560,11165 6530,11135 v3(6435,11135) ; v7(6600,9185) 6695,9090 7745,9090
  MidLayer1 w12: v3(6435,11135) 6235,10935 6235,9550 v7(6600,9185)
TRIG_CH12: UApu1.5 | length 3578.3
  TopLayer w8: 8323.23,8481.77 UApu1.5@8448.94,8481.77
  TopLayer w10: 7745,9060 8323.23,8481.77
  TopLayer w12: 6340,10110 6460,10110 6500,10070 6500,10020.51 6500,9965 6470,9935 v3(6375,9935) ; v7(6420,9185) 6545,9060 7745,9060
  MidLayer2 w12: v3(6375,9935) 6290,9850 6290,9315 v7(6420,9185)
TRIG_CH13: UApu1.6 | length 5756.3
  TopLayer w8: 8312.91,8462.09 UApu1.6@8448.94,8462.09
  TopLayer w10: 7745,9030 8312.91,8462.09
  TopLayer w12: 5480,11310 5600,11310 5640,11270 5640,11220.51 5640,11165 5610,11135 v3(5515,11135) ; v7(5535,9185) 5690,9030 7745,9030
  MidLayer1 w12: v3(5515,11135) 5315,10935 5315,9405 v7(5535,9185)
TRIG_CH14: UApu1.7 | length 4570.2
  TopLayer w8: 8302.6,8442.4 UApu1.7@8448.94,8442.4
  TopLayer w10: 7745,9000 8302.6,8442.4
  TopLayer w12: v7(5405,9185) 5590,9000 7745,9000 ; 5420,10110 5540,10110 5580,10070 5580,10020.51 5580,9965 5550,9935 v3(5455,9935)
  MidLayer2 w12: v7(5405,9185) 5370,9220 5370,9850 v3(5455,9935)
TRIG_CH15: UApu1.10 | length 6882.6
  TopLayer w8: 8331.65,8383.35 UApu1.10@8448.94,8383.35
  TopLayer w10: 7745,8970 8331.65,8383.35
  TopLayer w12: 4360,11310 4480,11310 4520,11270 4520,11220.51 4520,11165 4490,11135 v3(4395,11135) ; v7(4460,9185) 4675,8970 7745,8970
  MidLayer1 w12: v3(4395,11135) 4195,10935 4195,9450 v7(4460,9185)
TRIG_CH16: UApu1.11 | length 5741.6
  TopLayer w8: 8321.34,8363.66 UApu1.11@8448.94,8363.66
  TopLayer w10: 7745,8940 8321.34,8363.66
  TopLayer w12: v7(4260,9185) 4505,8940 7745,8940 ; 4300,10110 4420,10110 4460,10070 4460,10020.51 4460,9965 4430,9935 v3(4335,9935)
  MidLayer2 w12: v7(4260,9185) 4245,9200 4245,9845 v3(4335,9935)
TRIGIN: UApu1.143 | length 3670.6
  TopLayer w8: UApu1.143@8539.85,8631.38 8539.85,9104.85
  TopLayer w12: 8539.85,9104.85 8905,9470 8905,11515 9100,11710 9100,12070
TRIGOUT: UApu1.1 | length 3703.5
  TopLayer w8: 8364.49,8560.51 UApu1.1@8448.94,8560.51
  TopLayer w10: 8275,8650 8364.49,8560.51
  TopLayer w12: 8100,12070 8100,11690 8275,11515 8275,8850 8275,8650
WRITE*: UApu10.17 VME-BUS/J1.A14 | length 1036.3
  TopLayer w12: v1(11655,7095) UApu10.17@11709.13,7095
  MidLayer1 w12: VME-BUS/J1.A14@11470,6210 11520,6260 11520,6995 11620,7095 v1(11655,7095)
WRITE*PL: UApu1.96 UApu10.3 | length 3210.7
  TopLayer w8: UApu1.96@9279.65,8324.29 11074.43,8324.29
  TopLayer w10: 11074.43,8324.29 11460,7938.73 11460,7200 v1(11405,7145)
  TopLayer w12: UApu10.3@11350.87,7145 v1(11405,7145)
pads on no net: SumIn_1.1 SumIn_2.1 SumIn_3.1 SumIn_4.1 SyncroClk.SHIELD SyncroClk.WIRE TrigIN.SHIELD TrigIN.WIRE TrigOUT.SHIELD TrigOUT.WIRE UApu1.17 UApu1.20 UApu1.90 UApu1.92 UApu1.93 UApu1.104 UApu1.105 UApu10.2 UApu10.4 UG1.1 UG2.4 UG2.9 UG2.10 UG2.11 UG2.12 UG2.14 UG2.15 UG2.16 VME-BUS/J1.33 VME-BUS/J1.34 VME-BUS/J1.A9 VME-BUS/J1.A10 VME-BUS/J1.A31 VME-BUS/J1.B1 VME-BUS/J1.B2 VME-BUS/J1.B3 VME-BUS/J1.B12 VME-BUS/J1.B13 VME-BUS/J1.B14 VME-BUS/J1.B15 VME-BUS/J1.B21 VME-BUS/J1.B22 VME-BUS/J1.C9 VME-BUS/J1.C10 VME-BUS/J1.C11 VME-BUS/J1.C12 VME-BUS/J2.33 VME-BUS/J2.34 VME-BUS/J2.A1 VME-BUS/J2.A2 VME-BUS/J2.A3 VME-BUS/J2.A4 VME-BUS/J2.A5 VME-BUS/J2.A6 VME-BUS/J2.A7 VME-BUS/J2.A8 VME-BUS/J2.A9 VME-BUS/J2.A10 VME-BUS/J2.A11 VME-BUS/J2.A12 VME-BUS/J2.A13 VME-BUS/J2.A14 VME-BUS/J2.A15 VME-BUS/J2.A16 VME-BUS/J2.A17 VME-BUS/J2.A18 VME-BUS/J2.A19 VME-BUS/J2.A20 VME-BUS/J2.A21 VME-BUS/J2.A22 VME-BUS/J2.A23 VME-BUS/J2.A24 VME-BUS/J2.A25 VME-BUS/J2.A26 VME-BUS/J2.A27 VME-BUS/J2.A28 VME-BUS/J2.A29 VME-BUS/J2.A30 VME-BUS/J2.A31 VME-BUS/J2.A32 VME-BUS/J2.B3 VME-BUS/J2.B4 VME-BUS/J2.B5 VME-BUS/J2.B6 VME-BUS/J2.B7 VME-BUS/J2.B8 VME-BUS/J2.B9 VME-BUS/J2.B10 VME-BUS/J2.B11 VME-BUS/J2.B14 VME-BUS/J2.B15 VME-BUS/J2.B16 VME-BUS/J2.B17 VME-BUS/J2.B18 VME-BUS/J2.B19 VME-BUS/J2.B20 VME-BUS/J2.B21 VME-BUS/J2.B23 VME-BUS/J2.B24 VME-BUS/J2.B25 VME-BUS/J2.B26 VME-BUS/J2.B27 VME-BUS/J2.B28 VME-BUS/J2.B29 VME-BUS/J2.B30 VME-BUS/J2.C1 VME-BUS/J2.C2 VME-BUS/J2.C3 VME-BUS/J2.C4 VME-BUS/J2.C5 VME-BUS/J2.C6 VME-BUS/J2.C7 VME-BUS/J2.C8 VME-BUS/J2.C9 VME-BUS/J2.C10 VME-BUS/J2.C11 VME-BUS/J2.C12 VME-BUS/J2.C13 VME-BUS/J2.C14 VME-BUS/J2.C15 VME-BUS/J2.C16 VME-BUS/J2.C17 VME-BUS/J2.C18 VME-BUS/J2.C19 VME-BUS/J2.C20 VME-BUS/J2.C21 VME-BUS/J2.C22 VME-BUS/J2.C23 VME-BUS/J2.C24 VME-BUS/J2.C25 VME-BUS/J2.C26 VME-BUS/J2.C27 VME-BUS/J2.C28 VME-BUS/J2.C29 VME-BUS/J2.C30 VME-BUS/J2.C31 VME-BUS/J2.C32
copper on no net: | length 60546
  TopLayer w10: 9279.65,8481.76 11086.67,8481.76 11580,7988.43 11580,7120 v1(11655,7045) ; 9279.65,8501.25 11060,8501.25 11095.47,8501.25 11600,7996.72 11600,7200 v1(11655,7145)
  TopLayer w12: v1(11655,7045) 11709.13,7045 ; v1(11655,7145) 11709.13,7145
  TopLayer w40: 9599,6998.48 9600,6997.48
  BottomLayer w12: 4417,6209 4417,6232 4466.48,6281.48 4466.48,6506.48 4469,6509 v2(4469,7070) ; 4417,6409 v2(4417,7200) ; 4517,6209 4569,6261 v2(4569,7070) ; 4517,6409 v2(4517,7200) ; 4617,6209 4669,6261 v2(4669,7070) ; 4617,6409 v2(4617,7200) ; 4717,6209 4769,6261 v2(4769,7070) ; 4717,6409 v2(4717,7200) ; 4817,6209 4869,6261 v2(4869,7070) ; 4817,6409 v2(4817,7200) ; 4917,6209 4969,6261 v2(4969,7070) ; 4917,6409 v2(4917,7200) ; 5017,6209 5069,6261 v2(5069,7070) ; 5017,6409 v2(5017,7200) ; 5117,6209 5169,6261 v2(5169,7070) ; 5117,6409 v2(5117,7200) ; 5217,6209 5269,6261 v2(5269,7070) ; 5217,6409 v2(5217,7200) ; 5317,6209 5317,6232 5366.48,6281.48 5366.48,6506.48 5369,6509 v2(5369,7070) ; 5317,6409 v2(5317,7200) ; 5417,6209 5469,6261 v2(5469,7070) ; 5417,6409 v2(5417,7200) ; 5517,6209 5569,6261 v2(5569,7070) ; 5517,6409 v2(5517,7200) ; 5617,6209 5669,6261 v2(5669,7070) ; 5617,6409 v2(5617,7200) ; 5717,6209 5769,6261 v2(5769,7070) ; 5717,6409 v2(5717,7200) ; 5817,6209 5869,6261 v2(5869,7070) ; 5817,6409 v2(5817,7200) ; 5917,6209 5969,6261 v2(5969,7070) ; 5917,6409 v2(5917,7200) ; 6017,6209 6069,6261 v2(6069,7070) ; 6017,6409 v2(6017,7200) ; 6117,6209 6169,6261 v2(6169,7070) ; 6117,6409 v2(6117,7200) ; 6217,6209 6269,6261 v2(6269,7070) ; 6217,6409 v2(6217,7200) ; 6317,6209 6317,6232 6366.48,6281.48 6366.48,6506.48 6369,6509 v2(6369,7070) ; 6317,6409 v2(6317,7200) ; 6417,6209 6469,6261 v2(6469,7070) ; 6417,6409 v2(6417,7200) ; 6517,6209 6569,6261 v2(6569,7070) ; 6517,6409 v2(6517,7200) ; 6617,6209 6669,6261 v2(6669,7070) ; 6617,6409 v2(6617,7200) ; 6717,6209 6769,6261 v2(6769,7070) ; 6717,6409 v2(6717,7200) ; 6817,6209 6869,6261 v2(6869,7070) ; 6817,6409 v2(6817,7200) ; 6917,6209 6969,6261 v2(6969,7070) ; 6917,6409 v2(6917,7200) ; 7017,6209 7069,6261 v2(7069,7070) ; 7017,6409 v2(7017,7200) ; 7117,6209 7169,6261 v2(7169,7070) ; 7117,6409 v2(7117,7200) ; 7217,6209 7269,6261 v2(7269,7070) ; 7217,6409 v2(7217,7200) ; 7317,6209 7317,6232 7366.48,6281.48 7366.48,6506.48 7369,6509 v2(7369,7070) ; 7317,6409 v2(7317,7200) ; 7417,6209 7469,6261 v2(7469,7070) ; 7417,6409 v2(7417,7200) ; 7517,6209 7569,6261 v2(7569,7070) ; 7517,6409 v2(7517,7200)

## Polygon pours and split planes (outlines as drawn)
"+3.3 VDIG" on MidLayer1 "+3.3 Vdig" (hatched 45Degree grid 12 track 20, remove dead copper, pour order 6): 4317,12059 4317,6209 12867,6209 12867,12059 4317,12059
"+5 V" on MidLayer2 "+5 V" (hatched 45Degree grid 12 track 20, remove dead copper, pour order 5): 4317,12059 4317,6209 12867,6209 12867,12059 4317,12059

## Keep-outs
KeepOutLayer:
  lines w8: 4118,6209 4118,12059 4318,12059 4318,12234 9618,12234 12868,12234 12868,12059 13068,12059 13068,6209 12868,6209 12868,6059 9568,6059 9568,6209 9368,6209 9368,6059 7818,6059 7818,6209 7618,6209 7618,6059 4318,6059 4318,6209 4118,6209

## Silkscreen, mask and mechanical layers (free items; w line width, h text height)
TopOverlay:
  circle w10: c12967,12159 r112.5
  circle w10: c4217,12159 r112.5
  text "P2" at 5968,6609 h60 r270
TopPaste:
  text ".GTP" at 13637,12449 h90
BottomPaste:
  text ".GBP" at 13637,12449 h90
TopSolder:
  lines w20: 3999,6000 13186,6000 13186,6307 13248,6307 13248,6000 13936,6000 13936,12299 13248,12299 13248,11993 13186,11993 13186,12299 3999,12299 3999,6000 ; 13186,6493 13248,6493 13248,9057 13186,9057 13186,6493 ; 13186,9243 13248,9243 13248,11807 13186,11807 13186,9243
BottomSolder:
  lines w20: 3999,6000 3999,12299 13186,12299 13186,11993 13248,11993 13248,12299 13936,12299 13936,6000 13248,6000 13248,6307 13186,6307 13186,6000 3999,6000 ; 13186,6493 13186,9057 13248,9057 13248,6493 13186,6493 ; 13186,9243 13186,11807 13248,11807 13248,9243 13186,9243
Mechanical1:
  lines w20: 4000,6000 4000,12299 13187,12299 13187,11993 13249,11993 13249,12299 13937,12299 13937,6000 13249,6000 13249,6307 13187,6307 13187,6000 4000,6000 ; 13187,6493 13187,9057 13249,9057 13249,6493 13187,6493 ; 13187,9243 13187,11807 13249,11807 13249,9243 13187,9243
Mechanical4:
  text ".Pcb_File_Name_No_Path" at 11737,12639 h90
  text ".Printout_Name" at 11737,12449 h90
DrillDrawing:
  text "Drilling Details." at 3940,4775 h90
  text ".LEGEND" at 4138,4184 h90

## Dimensions
3980,6109 to 4000,6000 on Mechanical4
4217,5980 to 4000,6000 on Mechanical4

## Text inside footprints (layer, text, board x,y; h text height)
C1_Conv_Ch1: Mechanical3 "CHIP0805" at 12925,11220 h20 r90
C1_Conv_Ch2: Mechanical3 "CHIP0805" at 12865,10020 h20 r90
C1_Conv_Ch3: Mechanical3 "CHIP0805" at 11805,11220 h20 r90
C1_Conv_Ch4: Mechanical3 "CHIP0805" at 11745,10020 h20 r90
C1_Conv_Ch5: Mechanical3 "CHIP0805" at 10885,11220 h20 r90
C1_Conv_Ch6: Mechanical3 "CHIP0805" at 10825,10020 h20 r90
C1_Conv_Ch7: Mechanical3 "CHIP0805" at 9765,11220 h20 r90
C1_Conv_Ch8: Mechanical3 "CHIP0805" at 9705,10020 h20 r90
C1_Conv_Ch9: Mechanical3 "CHIP0805" at 7945,11220 h20 r90
C1_Conv_Ch10: Mechanical3 "CHIP0805" at 7885,10020 h20 r90
C1_Conv_Ch11: Mechanical3 "CHIP0805" at 6825,11220 h20 r90
C1_Conv_Ch12: Mechanical3 "CHIP0805" at 6765,10020 h20 r90
C1_Conv_Ch13: Mechanical3 "CHIP0805" at 5905,11220 h20 r90
C1_Conv_Ch14: Mechanical3 "CHIP0805" at 5845,10020 h20 r90
C1_Conv_Ch15: Mechanical3 "CHIP0805" at 4785,11220 h20 r90
C1_Conv_Ch16: Mechanical3 "CHIP0805" at 4725,10020 h20 r90
C3_Conv_Ch1: Mechanical3 "CHIP0805" at 12838.43,10689.45 h20
C3_Conv_Ch2: Mechanical3 "CHIP0805" at 12778.43,9489.45 h20
C3_Conv_Ch3: Mechanical3 "CHIP0805" at 11718.43,10689.45 h20
C3_Conv_Ch4: Mechanical3 "CHIP0805" at 11658.43,9489.45 h20
C3_Conv_Ch5: Mechanical3 "CHIP0805" at 10798.43,10689.45 h20
C3_Conv_Ch6: Mechanical3 "CHIP0805" at 10738.43,9489.45 h20
C3_Conv_Ch7: Mechanical3 "CHIP0805" at 9678.43,10689.45 h20
C3_Conv_Ch8: Mechanical3 "CHIP0805" at 9618.43,9489.45 h20
C3_Conv_Ch9: Mechanical3 "CHIP0805" at 7858.43,10689.45 h20
C3_Conv_Ch10: Mechanical3 "CHIP0805" at 7798.43,9489.45 h20
C3_Conv_Ch11: Mechanical3 "CHIP0805" at 6738.43,10689.45 h20
C3_Conv_Ch12: Mechanical3 "CHIP0805" at 6678.43,9489.45 h20
C3_Conv_Ch13: Mechanical3 "CHIP0805" at 5818.43,10689.45 h20
C3_Conv_Ch14: Mechanical3 "CHIP0805" at 5758.43,9489.45 h20
C3_Conv_Ch15: Mechanical3 "CHIP0805" at 4698.43,10689.45 h20
C3_Conv_Ch16: Mechanical3 "CHIP0805" at 4638.43,9489.45 h20
C4_Conv_Ch1: Mechanical3 "CEL-SMD300" at 12490,10884.49 h20 r270
C4_Conv_Ch2: Mechanical3 "CEL-SMD300" at 12430,9684.49 h20 r270
SumIn_2: TopOverlay "6" at 10066.73,12194.13 h59.06; TopOverlay "9" at 10393.9,12194.13 h59.06; TopOverlay "5" at 10448.43,11824.06 h59.06; TopOverlay "1" at 10022.05,11824.06 h59.06
SumIn_3: TopOverlay "6" at 6736.73,12194.13 h59.06; TopOverlay "9" at 7063.9,12194.13 h59.06; TopOverlay "5" at 7118.43,11824.06 h59.06; TopOverlay "1" at 6692.05,11824.06 h59.06
SumIn_4: TopOverlay "6" at 5106.73,12194.13 h59.06; TopOverlay "9" at 5433.9,12194.13 h59.06; TopOverlay "5" at 5488.43,11824.06 h59.06; TopOverlay "1" at 5062.05,11824.06 h59.06
UApu2: Mechanical2 "8SO200" at 7884.29,7971.02 h20
Usup1: Mechanical2 "TO-252" at 8905,6870 h30
Usup2: Mechanical2 "TO-252" at 8130,6870 h30
Usup3: Mechanical2 "TO-252" at 16375,6220 h30
VME-BUS/J1: TopOverlay "21" at 10819.21,6516.3 h59.06 r180; TopOverlay "11" at 11804.45,6516.3 h59.06 r180; TopOverlay "32" at 9719.21,6516.3 h59.06 r180; TopOverlay "c" at 12857.01,6429.68 h59.06 r180; TopOverlay "b" at 12857.01,6329.68 h59.06 r180; TopOverlay "a" at 12857.01,6229.68 h59.06 r180; TopOverlay "1" at 12779.84,6516.3 h59.06 r180; Mechanical1 "PCB Edge" at 13049.53,5981.65 h23.62 r180
VME-BUS/J2: TopOverlay "21" at 5566.21,6515.3 h59.06 r180; TopOverlay "11" at 6551.45,6515.3 h59.06 r180; TopOverlay "32" at 4466.21,6515.3 h59.06 r180; TopOverlay "c" at 7604.01,6428.68 h59.06 r180; TopOverlay "b" at 7604.01,6328.68 h59.06 r180; TopOverlay "a" at 7604.01,6228.68 h59.06 r180; TopOverlay "1" at 7526.84,6515.3 h59.06 r180; Mechanical1 "PCB Edge" at 7796.53,5980.65 h23.62 r180